# Altium PCB NetTroll.PcbDoc (part 1 of 2)
Units mm, origin at the board's own origin, x right, y up, seen from the top; angles counter-clockwise.
Board outline 65 x 60 mm, 2 copper layers (Top Layer, Bottom Layer); 90 components, 102 nets, 423 pads, 380 vias.
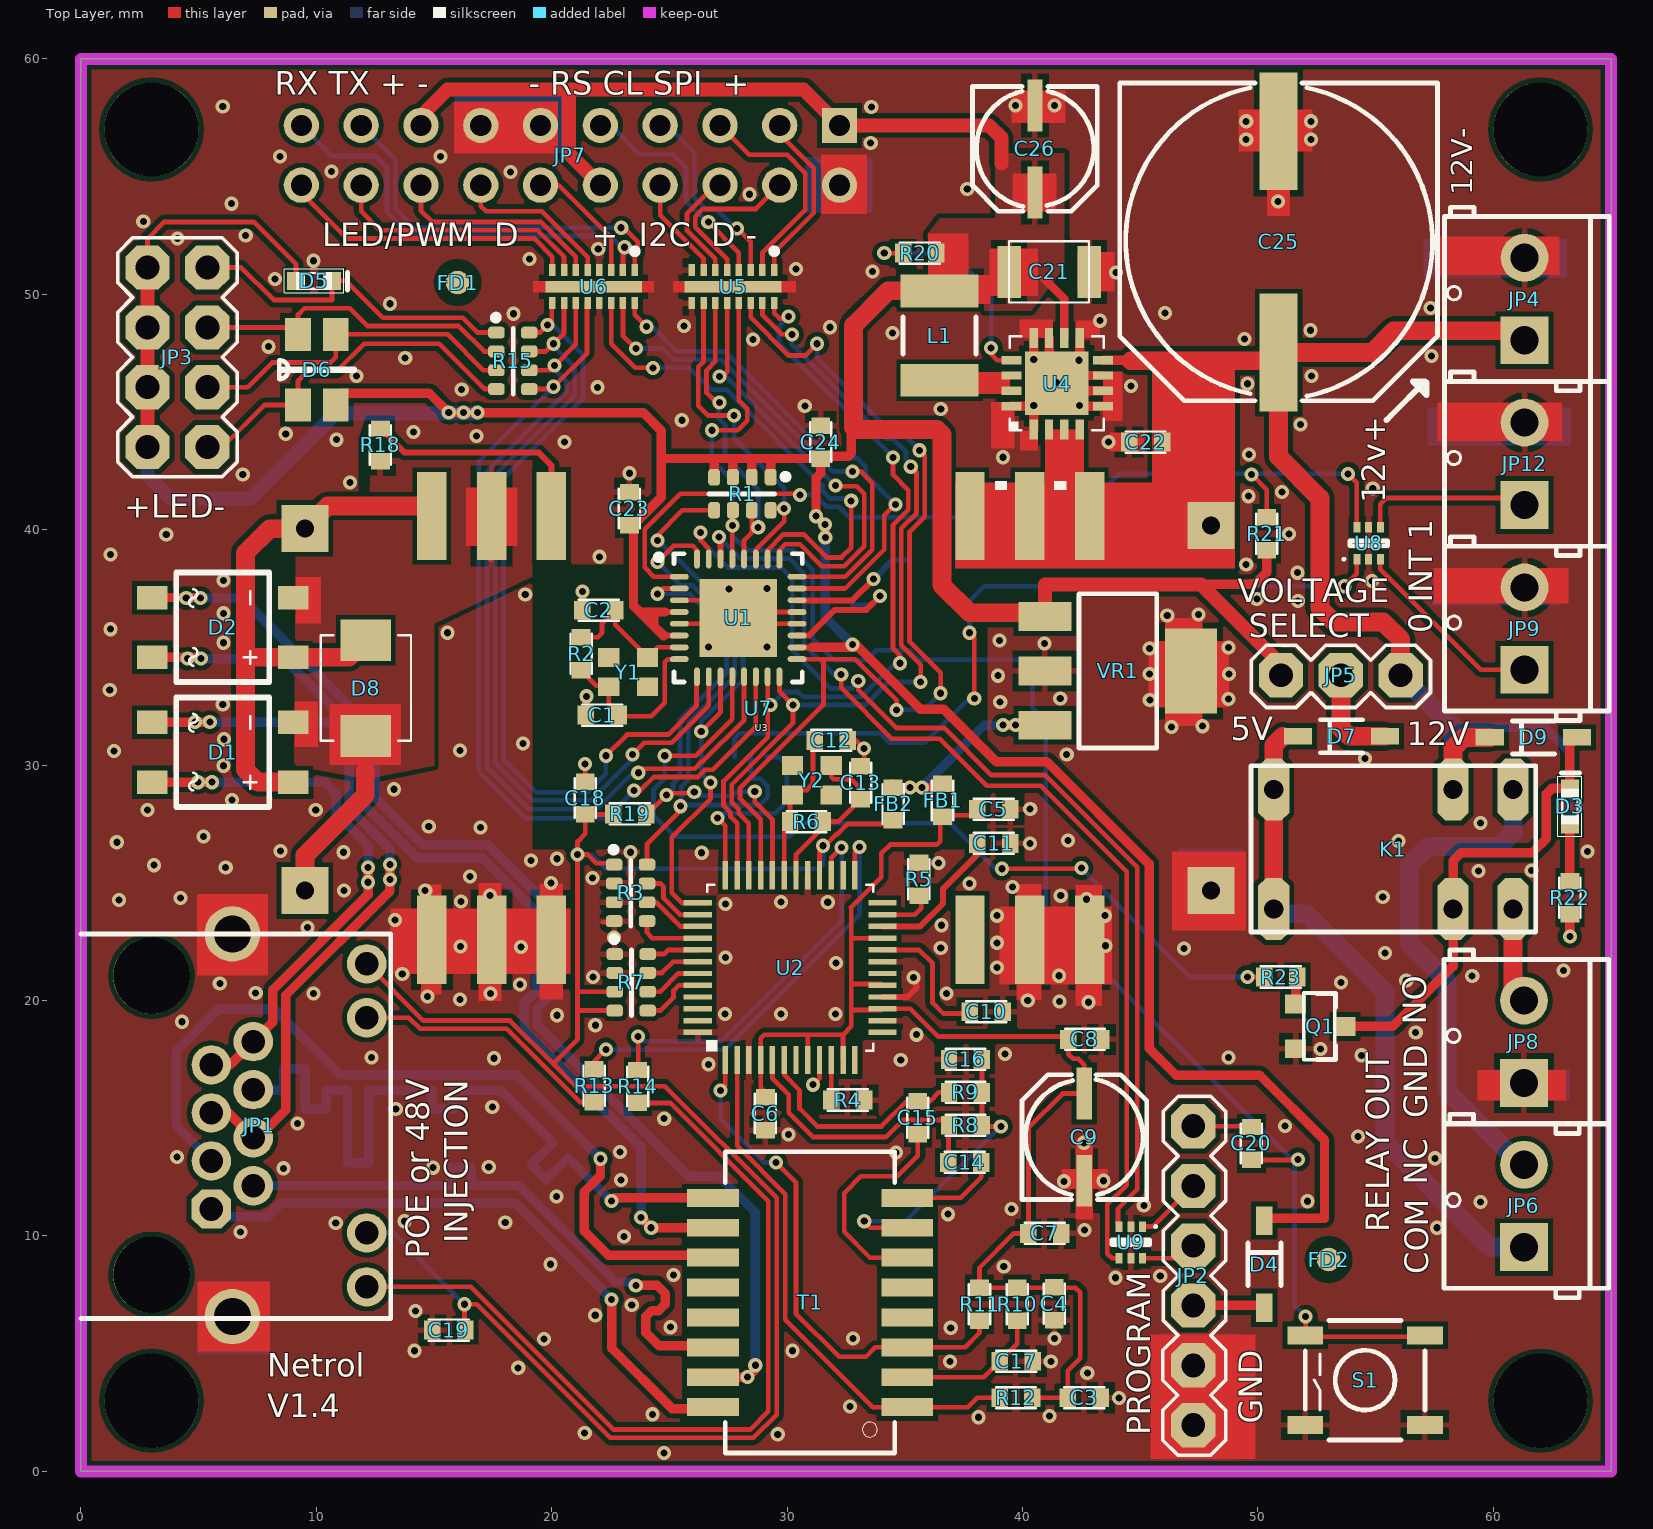
[diagram p0: Top Layer view]
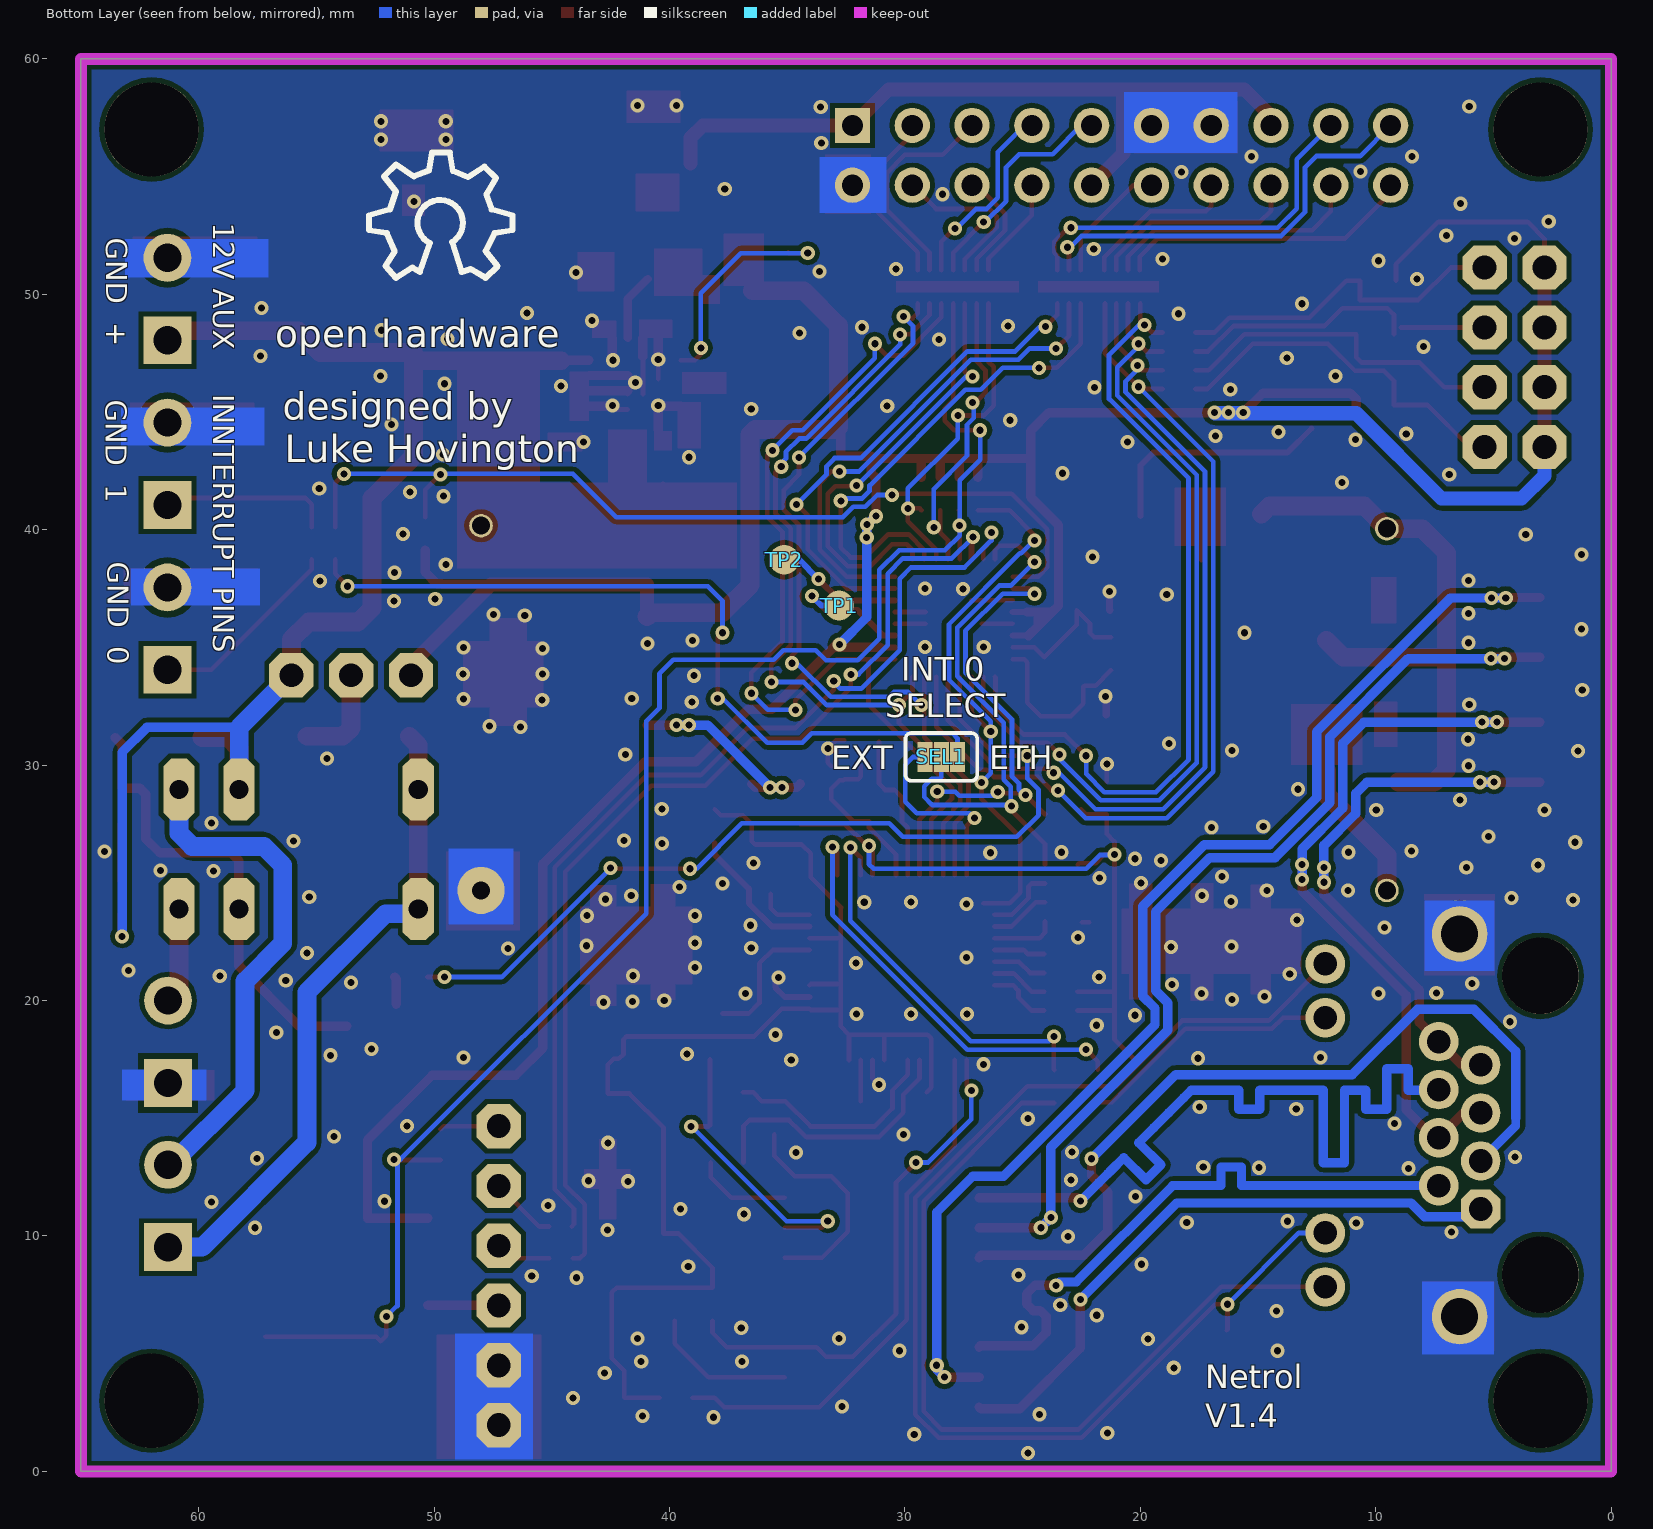
[diagram p1: Bottom Layer view, seen from below]

## Layer stack, top to bottom
Top Solder: solder mask 0.0102, Solder Resist, Dk 3.5
Top Layer: signal copper 0.0356
Dielectric1: dielectric 0.32, FR-4, Dk 4.8
Bottom Layer: signal copper 0.0356
Bottom Solder: solder mask 0.0102, Solder Resist, Dk 3.5

## Board outline
0,0 0,60 65,60 65,0

## Design rules (kind name [scope] priority, off if disabled: settings)
Clearance FDM [HasFootprint('FD')] p1: gap=0.5
Clearance Clearance_poly_pads [Inpolygon] p2: gap=0.2
Clearance Clearance_1 [InComponent('SEL1')] p3: gap=0.05
Clearance [All] p4: gap=0.15
ComponentClearance [Not InComponent('U3')] p1 off: gap=0.254 collisioncheckmode=3 verticalgap=0.254 showdistances=FALSE
DiffPairsRouting [All] p1: maxlimit=0.254 minlimit=0.254 mostfreqgap=0.254 toplayer_minwidth=0.381 toplayer_maxwidth=0.381 toplayer_prefwidth=0.381 bottomlayer_minwidth=0.381 bottomlayer_maxwidth=0.381 bottomlayer_prefwidth=0.381 maxuncoupledlength=12.7
HoleSize [All] p1: absolutevalues=TRUE maxlimit=4 minlimit=0.025 maxpercent=80.000 minpercent=20.000
HoleToHoleClearance [All] p1: gap=0.2 allowstackedmicrovias=TRUE
MatchedLengths Eth_Chip_TX [All] p1: tolerance=0.5 checknetsindiffpair=TRUE checkdiffpairvsdiffpair=TRUE checkothers=FALSE
MinimumSolderMaskSliver [All] p1 off: minsoldermaskwidth=0.254
PolygonConnect PolygonConnect_1 [All vs isvia] p1: connectstyle=Direct reliefconductorwidth=0.254 reliefentries=4 polygonreliefangle="90 Angle" airgapwidth=0.254
PolygonConnect [All] p2: connectstyle=Relief reliefconductorwidth=0.254 reliefentries=4 polygonreliefangle="90 Angle" airgapwidth=0.254
RoutingVias [All] p1: holewidth=0.3 width=0.6 viastyle="Through Hole" minholewidth=0.25 minwidth=0.6 maxholewidth=0.711 maxwidth=1.27
SilkToSilkClearance [All] p1 off: silktosilkclearance=0.254
SilkToSolderMaskClearance [IsPad] p1 off: minsilkscreentomaskgap=0.15 clearancetoexposedcopper=TRUE
SolderMaskExpansion [All] p1: expansion=0.102
UnpouredPolygon [All] p1: allowunpoured=FALSE
Width [All] p1: maxlimit=0.8 minlimit=0.2 preferedwidth=0.254 minimp=50.000000 maximp=50.000000 favimp=50.000000
22 further rules are at their usual default settings.

## Classes and differential pairs
component class Ethernet: C3 C4 C5 C6 C7 C8 C9 C10 C11 C12 C13 C14 C15 C16 C17 C18 C19 D1 D2 D8 FB1 FB2 JP1 R3 R4 R5 R6 R7 R8 R9 R10 R11 R12 R13 R14 R19 SEL1 T1 U2 Y2
component class Designator: C1 C2 C21 C22 C23 C24 C25 C26 L1 R1 R2 R18 R20 S1 U1 U3 U4 U7 VR1 Y1
component class U_Output: C20 D3 D4 D5 D6 D7 D9 FD1 FD2 JP2 JP3 JP4 JP5 JP6 JP7 JP8 JP9 JP12 K1 Q1 R15 R21 R22 R23 TP1 TP2 U5 U6 U8 U9
differential pair XD1: +XD1_P -XD1_N
differential pair EP_RX: +EP_RX_P -EP_RX_N
differential pair EP_TX: +EP_TX_P -EP_TX_N
differential pair EC_RX: +EC_RX_P -EC_RX_N
differential pair RX: +RX_P -RX_N
differential pair TX: +TX_P -TX_N

## Components (designator, comment, footprint, x,y, rotation, side; value= is the part's Value field where it differs from the comment)
C1 "10pF" 0603 21.446,32.129 r0 top
C2 "10pF" 0603 21.296,36.579 r0 top
C3 "100nF" 0603 43.321,3.129 r180 top
C4 "100nF" 0603 41.348,6.425 r90 top
C5 "100nF" 0603 39.475,28.125 r180 top
C6 "100nF" 0603 29.075,14.5 r90 top
C7 "100nF" 0603 41.648,10.106 r180 top
C8 "100nF" 0603 43.35,18.35 r180 top
C9 "100uF" PANASONIC_C 42.425,14.15 r90 top
C10 "4.7uF" 0603 39.15,19.525 r180 top
C11 "10nF" 0603 39.475,26.675 r180 top
C12 "10pF" 0603 32.571,31.054 r180 top
C13 "10pF" 0603 33.121,29.954 r270 top
C14 "6.8nF" 0603 38.25,13.125 r180 top
C15 "6.8nF" 0603 35.55,14.325 r90 top
C16 "10nF" 0603 36.875,17.5 r0 top
C17 "100nF" 0603 40.425,4.675 r180 top
C18 "100nF" 0603 21.421,29.304 r270 top
C19 "100nF" 0603 14.925,6 r0 top
C20 "100nF" 0603 49.721,14.629 r270 top
C21 "22uF" 1210 42.825,50.95 r180 top
C22 "10uF" 0603 45.925,43.725 r180 top
C23 "10uF" 0603 23.3,41.6 r270 top
C24 "10uF" 0603 31.425,44.425 r270 top
C25 "1000uF" PANASONIC_H13 50.875,52.225 r270 top
C26 "100uF" PANASONIC_C 40.725,56.225 r270 top
D1 "HD01-T" MBS 6.025,30.55 r90 top
D2 "HD01-T" MBS 6.025,35.85 r90 top
D3 "LED" LED-0603 63.25,28.25 r90 top
D4 "Diode" SOD-123 50.275,8.8 r90 top
D5 "LED" LED-0603 9.9,50.575 r0 top
D6 "LED-RGB_K" RGB-CLVBAFKA 9.225,45.3 r90 top
D7 "Diode" SOD-123 53.55,31.225 r180 top
D8 "SMAJ58CA-TR" SMBJ 12.1,33.275 r270 top
D9 "Diode" SOD-123 61.7,31.175 r180 top
FB1 "Ferrite Bead" 0603 36.6,29.2 r270 top
FB2 "Ferrite Bead" 0603 34.5,29.05 r270 top
FD1 "Fiducial" FD#1 21.975,43.375 r0 top
FD2 "Fiducial" FD#2 55.3,8.425 r90 top
JP1 "RJHSE-5384" RJHSE-5484 3,14.7 r270 top
JP2 "Programming FTDI Header" 1X6 48.521,10.854 r270 top
JP3 "Optional External LED's" 2X4 4.1,47.325 r270 top
JP4 "12V In/Out" SCREWTERMINAL-3.5MM-2 61.325,48.05 r90 top
JP5 "Relay Voltage Jumper" 1X3 52.25,32.55 r180 top
JP6 "Common/NC" SCREWTERMINAL-3.5MM-2 61.3,9.525 r90 top
JP7 "Optional I/O" 2X10 32.225,57.175 r180 top
JP8 "GND/NO" SCREWTERMINAL-3.5MM-2 61.3,16.5 r90 top
JP9 "Selectable interrupt Via solder bridge" SCREWTERMINAL-3.5MM-2 61.325,34.05 r90 top
JP12 "Main Interrupt" SCREWTERMINAL-3.5MM-2 61.325,41.05 r90 top
K1 "G5V-1-DC12" G5V-1 55.75,26.425 r180 top
L1 "6.8uH" 1812 36.475,48.25 r90 top
Q1 "BCX19" SOT23-3 52.6,18.9 r90 top
R1 "10K" SO8_S 29.296,42.229 r270 top
R2 "1M" 0603 21.246,34.029 r90 top
R3 "10K" SO8_S 22.65,25.775 r0 top
R4 "12K4" 0603 33.275,15.775 r180 top
R5 "10K" 0603 35.6,25.85 r270 top
R6 "1M" 0603 30.121,27.604 r0 top
R7 "10K" SO8_S 22.675,21.975 r0 top
R8 "82R" 0603 36.875,14.7 r0 top
R9 "82R" 0603 38.275,16.1 r180 top
R10 "10R" 0603 39.771,6.404 r90 top
R11 "49R9" 0603 38.171,6.404 r90 top
R12 "49R9" 0603 39.021,3.129 r0 top
R13 "220R" 0603 21.8,15.675 r90 top
R14 "220R" 0603 23.65,15.65 r90 top
R15 "100R" SO8_S 17.65,48.375 r0 top
R18 "ClassR" 0603 12.725,42.9 r90 top
R19 "10K" 0603 24.021,27.929 r180 top
R20 "1M" 0603 34.925,51.75 r0 top
R21 "10K" 0603 50.375,39.125 r90 top
R22 "470R" 0603 63.25,25.075 r270 top
R23 "4K7" 0603 51.675,21 r180 top
S1 "SW-PB" TACTILE_SWITCH_SMD 54.55,3.875 r180 top
SEL1 "SELECTOR" SJ_3_PASTE2&3 28.45,30.35 r0 bottom
T1 "H2019FNLT" HXXXX 30.975,7.175 r90 top
TP1 "Test Point" PAD.03X.05 32.796,36.779 r90 bottom
TP2 "Test Point" PAD.03X.05 35.125,38.725 r90 bottom
U1 "ATmega328P-MUR" 32M1-A_N 27.921,36.254 r0 top
U2 "Wiznet-W5500" QFN48 30.125,21.4 r90 top
U3 "AG8112" AG8100 42.846,40.579 r180 top
U4 "TPS62112RSAT" 16-QFN 41.45,46.225 r90 top
U5 "NUF8402MNT4G" ONSC-DFN-16-506AC_V 27.7,50.325 r270 top
U6 "NUF8402MNT4G" ONSC-DFN-16-506AC_V 21.775,50.325 r270 top
U7 "Buck Converter" BUCK_MODULE 28.7,32.425 r0 top
U8 "NUF2230XV6T1G" ONSC-SOT-563-6-463A-01_V 54.7,39.425 r90 top
U9 "NUF2230XV6T1G" ONSC-SOT-563-6-463A-01_V 44.6,9.725 r270 top
VR1 "VReg 3V3" SOT223 44.05,34 r270 top
Y1 "16MHz" CRYSTAL-SMD-2.5X2-ABM10 23.271,33.979 r0 top
Y2 "25Mhz" CRYSTAL-SMD-2.5X2-ABM10 31.071,29.379 r0 top

## Footprints (in the part's own frame and the unit in brackets; to place one, negate y for a bottom-side part, rotate by r counter-clockwise, add the part's x,y. Pads: shape width x height; smd on the part's side, far side on the other; paste and mask are expansions set on the pad)
1X3 [mil]
  oct 74x74 hole 40: 1(-150,-50) 2(-50,-50) 3(50,-50)
  silkscreen extent -200,-100 100,4
1X6 [mil]
  oct 74x74 hole 40: 1(-150,-50) 2(-50,-50) 3(50,-50) 4(150,-50) 5(250,-50) 6(350,-50)
  silkscreen extent -200,-101 400,4
2X4 [mil]
  oct 74x74 hole 40: 1(-150,-50) 2(-150,50) 3(-50,-50) 4(-50,50) 5(50,-50) 6(50,50) 7(150,-50) 8(150,50)
  silkscreen extent -200,-100 200,100
2X10 [mm] "Connector; Header; 10x2 Position"
  rect 1.5x1.5 hole 0.9: 1(0,0)
  round 1.5 hole 0.9: 2(0,2.54) 3(2.54,0) 4(2.54,2.54) 5(5.08,0) 6(5.08,2.54) 7(7.62,0) 8(7.62,2.54) 9(10.16,0) 10(10.16,2.54) 11(12.7,0) 12(12.7,2.54) 13(15.24,0) 14(15.24,2.54) 15(17.78,0) 16(17.78,2.54) 17(20.32,0) 18(20.32,2.54) 19(22.86,0) 20(22.86,2.54)
16-QFN [mm]
  rect 2.7x2.7 smd paste-0.55: 0(0,0)
  rect 0.85x0.35 smd paste-0.05: 1(-1.975,0.975) 2(-1.975,0.325) 3(-1.975,-0.325) 4(-1.975,-0.975) 9(1.925,-0.975) 10(1.925,-0.325) 11(1.925,0.325) 12(1.925,0.975)
  rect 0.35x0.85 smd paste-0.05: 5(-0.975,-1.975) 6(-0.325,-1.975) 7(0.325,-1.975) 8(0.975,-1.975) 13(0.975,1.925) 14(0.325,1.925) 15(-0.325,1.925) 16(-0.975,1.925)
  silkscreen extent -2,-2 2,2
32M1-A_N [mm] "QFN, 32-Leads, Body 5x5mm, Pitch 0.5mm, IPC Medium Density"
  oval 0.8x0.25 smd paste-0.04: 1(-2.5,1.75) 2(-2.5,1.25) 3(-2.5,0.75) 4(-2.5,0.25) 5(-2.5,-0.25) 6(-2.5,-0.75) 7(-2.5,-1.25) 8(-2.5,-1.75) 17(2.5,-1.75) 18(2.5,-1.25) 19(2.5,-0.75) 20(2.5,-0.25) 21(2.5,0.25) 22(2.5,0.75) 23(2.5,1.25) 24(2.5,1.75)
  oval 0.25x0.8 smd paste-0.04: 9(-1.75,-2.5) 10(-1.25,-2.5) 11(-0.75,-2.5) 12(-0.25,-2.5) 13(0.25,-2.5) 14(0.75,-2.5) 15(1.25,-2.5) 16(1.75,-2.5) 25(1.75,2.5) 26(1.25,2.5) 27(0.75,2.5) 28(0.25,2.5) 29(-0.25,2.5) 30(-0.75,2.5) 31(-1.25,2.5) 32(-1.75,2.5)
  rect 3.3x3.3 smd paste-0.6: 33(0,0)
  silkscreen extent -3.5,-2.73 2.73,2.73, body extent -2.58,-2.58 2.58,2.58, height 1
0603 [mm]
  rect 0.7x0.8 smd paste+0 mask+0.1: 1(0,0) 2(1.4,0)
  silkscreen extent -0.15,-0.45 1.55,0.45, body extent -0.15,-0.45 1.55,0.45, height 0.53
1210 [mm] "Chip Resistor; Body 3.2 x 1.6 mm (LxW typ)"
  rect 1x2.2 smd paste+0 mask+0.1: 1(0,0) 2(3.4,0)
  silkscreen extent 0,-1.3 3.4,1.3
1812 [mm] "Chip Capacitor, Body 4.5x3.2mm, IPC High Density"
  rect 1.4x3.3 smd: 1(-1.9,0) 2(1.9,0)
  silkscreen extent -0.8,-1.55 0.8,1.55, body extent -2.4,-1.7 2.4,1.7, height 2.6
AG8100 [mm]
  rect 1.25x3.75 smd: 1(0,0) 2(2.54,0) 3(5.08,0) 4(22.86,0) 5(25.4,0) 6(27.94,0) 7(27.94,18) 8(25.4,18) 9(22.86,18) 10(5.08,18) 11(2.54,18) 12(0,18)
  silkscreen extent 0.97,-1.5 4.02,-1.1, body extent -1.25,-1.12 29.13,19.38, height 10
BUCK_MODULE [mil]
  rect 78.74x78.74 / inner rect 78.74x78.74 / far side round 39.37 hole 30: 1(-755,300) 4(-755,-305)
  rect 78.74x78.74 / inner round 39.37 / far side round 39.37 hole 30: 2(760,305)
  rect 78.74x78.74 / inner rect 78.74x78.74 / far side round 78.74 hole 30: 3(760,-305)
  body extent -855,-400 855,400, height 591
CRYSTAL-SMD-2.5X2-ABM10 [mm]
  rect 0.9x0.8 smd: 1(-0.85,-0.65) 2(0.8,-0.65) 3(0.8,0.6) 4(-0.85,0.6)
  body extent -1.3,-1.05 1.3,1.05, height 0.5
FD#1 [mm]
  round 1 smd paste-2 mask+0.5: 0(-5.975,7.125)
FD#2 [mm]
  round 1 smd paste-2 mask+0.5: 0(0.575,2.3)
G5V-1 [mil]
  oct 52x104 hole 32: 1(-200,-100) 2(-100,-100) 5(200,-100) 6(200,100) 9(-100,100) 10(-200,100)
  silkscreen extent -238,-140 238,138, body extent -241,-143 241,143, height 394
HXXXX [mm]
  rect 0.76x2.2 smd: 1(-4.445,-4.128) 2(-3.175,-4.128) 3(-1.905,-4.128) 4(-0.635,-4.128) 5(0.635,-4.128) 6(1.905,-4.128) 7(3.175,-4.128) 8(4.445,-4.128) 9(4.445,4.127) 10(3.175,4.127) 11(1.905,4.127) 12(0.635,4.127) 13(-0.635,4.127) 14(-1.905,4.127) 15(-3.175,4.127) 16(-4.445,4.127)
  silkscreen extent -6.4,-3.6 6.4,3.6, body extent -6.38,-4.28 6.38,4.13, height 6
LED-0603 [mil]
  rect 30x30 smd: 1(-30,0) 2(30,0)
  Top Overlay keep-out lines w2: -50,20 -50,-20 50,-20 50,20 -50,20
  silkscreen extent -50,-20 56,20
MBS [mm]
  rect 1x1.3 smd: +(-1.27,-3) -(1.27,-3) AC1(-1.27,3) AC2(1.27,3)
  silkscreen extent -2.32,-1.98 2.33,1.98, body extent -2.37,-2 2.37,2, height 2.7
ONSC-DFN-16-506AC_V [mm] "SON, 16-Leads, Body 4x1.6mm, Pitch 0.5mm, Thermal Pad 4.1x0.5mm"
  rect 0.51x0.28 smd: 1(-0.7,1.75) 2(-0.7,1.25) 3(-0.7,0.75) 4(-0.7,0.25) 5(-0.7,-0.25) 6(-0.7,-0.75) 7(-0.7,-1.25) 8(-0.7,-1.75) 9(0.7,-1.75) 10(0.7,-1.25) 11(0.7,-0.75) 12(0.7,-0.25) 13(0.7,0.25) 14(0.7,0.75) 15(0.7,1.25) 16(0.7,1.75)
  rect 0.5x4.1 smd: 17(0,0)
  silkscreen extent -1.63,1.63 -1.38,1.88, body extent -0.8,-2 0.8,2, height 1
ONSC-SOT-563-6-463A-01_V [mm] "SOT23, 6-Leads, Body 1.6x1.2mm, Pitch 0.5mm"
  rect 0.45x0.3 smd: 1(-0.675,0.5) 2(-0.675,0) 3(-0.675,-0.5) 4(0.675,-0.5) 5(0.675,0) 6(0.675,0.5)
  silkscreen extent -0.72,-0.8 0.1,1.1, body extent -0.6,-0.8 0.6,0.8, height 0.6
PAD.03X.05 [mm]
  round 1.27 smd: 1(0,0)
PANASONIC_C [mm]
  rect 2.2x0.65 smd: +(1.9,-0.2) -(-1.8,-0.2)
  silkscreen extent -2.6,-2.85 2.7,2.45, body extent -2.63,-2.88 2.75,2.5, height 5.4
PANASONIC_H13 [mm]
  rect 5x1.6 smd: +(4.7,0) -(-4.7,0)
  silkscreen extent -6.75,-6.75 6.75,6.75, body extent -6.75,-6.75 6.75,6.75, height 13.5
QFN48 [mm]
  rect 1.2x0.23 smd: 1(-3.925,2.75) 2(-3.925,2.25) 3(-3.925,1.75) 4(-3.925,1.25) 5(-3.925,0.75) 6(-3.925,0.25) 7(-3.925,-0.25) 8(-3.925,-0.75) 9(-3.925,-1.25) 10(-3.925,-1.75) 11(-3.925,-2.25) 12(-3.925,-2.75) 25(3.925,-2.75) 26(3.925,-2.25) 27(3.925,-1.75) 28(3.925,-1.25) 29(3.925,-0.75) 30(3.925,-0.25) 31(3.925,0.25) 32(3.925,0.75) 33(3.925,1.25) 34(3.925,1.75) 35(3.925,2.25) 36(3.925,2.75)
  rect 0.23x1.2 smd: 13(-2.75,-3.925) 14(-2.25,-3.925) 15(-1.75,-3.925) 16(-1.25,-3.925) 17(-0.75,-3.925) 18(-0.25,-3.925) 19(0.25,-3.925) 20(0.75,-3.925) 21(1.25,-3.925) 22(1.75,-3.925) 23(2.25,-3.925) 24(2.75,-3.925) 37(2.75,3.925) 38(2.25,3.925) 39(1.75,3.925) 40(1.25,3.925) 41(0.75,3.925) 42(0.25,3.925) 43(-0.25,3.925) 44(-0.75,3.925) 45(-1.25,3.925) 46(-1.75,3.925) 47(-2.25,3.925) 48(-2.75,3.925)
  silkscreen extent -3.57,-3.53 3.52,3.57
RGB-CLVBAFKA [mm]
  rect 1.4x1.1 smd: 1(0,0) 2(0,-1.6) 3(3,-1.6) 4(3,0)
  silkscreen extent 1.1,-2.4 1.9,0.8
RJHSE-5484 [mm]
  oct 1.676x1.676 hole 1: 1(3.555,2.54)
  round 1.676 hole 1: 2(2.565,4.32) 3(1.515,2.54) 4(0.525,4.32) 5(-0.525,2.54) 6(-1.515,4.32) 7(-2.565,2.54) 8(-3.555,4.32) 9(-6.86,9.14) 10(-4.57,9.14) 11(4.57,9.14) 12(6.86,9.14)
  round 2.355 hole 1.57: GND1(-8.13,3.43) GND2(8.13,3.43)
  round 3.25 hole 3.25 unplated: ""(-6.35,0) ""(6.35,0)
  silkscreen extent -8.13,-3 8.2,10.16, body extent -8.13,-5.08 8.2,10.15, height 13.46
SCREWTERMINAL-3.5MM-2 [mil]
  rect 80x80 hole 47.24: 1(0,0)
  round 80 hole 47.24: 2(137.79,0)
  silkscreen extent -85,-142 222,134, body extent -69,-143 207,133, height 327
SJ_3_PASTE2&3 [mm]
  rect 0.635x1.27 smd paste-0.838: 1(-0.685,0)
  rect 0.635x1.27 smd: 2(0,0) 3(0.685,0)
  silkscreen extent -1.52,-1.02 1.52,1.02
SMBJ [mm]
  rect 1.78x2.16 smd: 1(2.04,0) 2(-2.03,0)
  silkscreen extent -2.24,-1.92 2.24,1.92, body extent -2.25,-1.92 2.25,1.92, height 2.45
SO8_S [mm] "SOIC, 8-Leads, Body 4.9x3.9mm, Pitch 1.27mm, IPC Low Density"
  rrect50% 0.7x0.5 smd: 1(0,0) 2(0,-0.8) 3(0,-1.6) 4(0,-2.4) 5(1.4,-2.4) 6(1.4,-1.6) 7(1.4,-0.8) 8(1.4,0)
  silkscreen extent -0.15,-2.62 0.71,0.76, body extent -0.05,-2.88 1.43,0.58, height 0.53
SOD-123 [mm]
  rect 1.2x0.7 smd: A(-1.85,0) K(1.85,0)
  silkscreen extent -0.9,-0.7 0.9,0.7, body extent -1.25,-0.75 1.25,0.75, height 1.36
SOT23-3 [mm]
  rect 0.8x0.9 smd: 1(-0.95,1) 2(0.95,1) 3(0,-1.1)
  silkscreen extent -1.42,-0.7 1.42,0.66
SOT223 [mil]
  rect 48x88 smd: 1(-91,-122) 2(0,-122) 3(91,-122)
  rect 141.73x86.61 smd: 2(0,122.01)
  silkscreen extent -129,-65 129,65
TACTILE_SWITCH_SMD [mil]
  rect 60x30 smd: 1(-100,75) 2(100,75) 3(-100,-75) 4(100,-75)
  silkscreen extent -100,-100 100,100, body extent -103,-108 103,103, height 122

## Part data
C1 C2 C12 C13: library part Cap_10pF, "Capacitor (Semiconductor SIM Model)"
C3 C4 C5 C6 C7 C8 C18 C19: library part Cap_100pF, "Capacitor (Semiconductor SIM Model)"
C9 C26: library part Cap_Polarized_100uF, "Polarized Capacitor (Surface Mount)"
C10: library part Cap_4.7uF, "Capacitor (Semiconductor SIM Model)"
C11 C16: library part Cap_10nF, "Capacitor (Semiconductor SIM Model)"
C14 C15: library part Cap_6.8nF, "Capacitor (Semiconductor SIM Model)"
C17 C20: library part Cap_100nF, "Capacitor (Semiconductor SIM Model)"
C21: library part Cap_22uF, "Capacitor (Semiconductor SIM Model)"
C22 C23 C24: library part Cap_10uF, "Capacitor (Semiconductor SIM Model)"
C25: library part Cap_Polarized_1000uF, "Polarized Capacitor (Surface Mount)"
D1 D2: library part "Diode Bridge", "Diode Bridge"
D3 D5: "Typical RED, GREEN, YELLOW, AMBER GaAs LED"
D4 D7 D9: "Default Diode"
D6: "RED, GREEN, BLUE LED"
D8: library part Diode_POWER, "Default Diode"
JP1: library part "Ethernet Socket", "Ethernet Socket RJ45 With Leds"
JP2: library part "Header 6", "Header, 6-Pin"
JP3: library part "Header 4x2", "Header, 8-Pin"
JP4 JP6 JP8 JP9 JP12: library part "Header 2_ST", "Header, 2-Pin"
JP5: library part "Header 3", "Header, 3-Pin"
JP7: library part "Header 10X2", "Header, 10-Pin, Dual row"
K1: library part Relay-SPDT, "Single-Pole Dual-Throw Relay"
L1: library part INDUCTOR, "INDUCTOR WW 6.8UH 1.1A 1812 SMD"
Q1: "NPN General Purpose"
R1 R3 R7: library part Resistor_Pack_10K, "Isolated Resistor Network - Parts"
R2 R6 R20: library part Resistor_1M, "Resistor"
R4: library part Resistor_12K4, "Resistor"
R5 R19 R21: library part Resistor_10K, "Resistor"
R8 R9: library part Resistor_82R, "Resistor"
R10: library part Resistor_10R, "Resistor"
R11 R12: library part Resistor_49R9, "Resistor"
R13 R14: library part Resistor_220R, "Resistor"
R15: library part Resistor_Pack_100R, "Isolated Resistor Network - Parts"
R18: library part Resistor, "Resistor"
R22: library part Resistor_470R, "Resistor"
R23: library part Resistor_4K7, "Resistor"
S1: "Switch"
SEL1: "Solder Selector"
T1: library part Magnetics, "Power over Ethernet Magnetic Module"
TP1 TP2: library part TestPoint, "Header, 2-Pin"
U1: "8-bit AVR Microcontroller, 32KB Flash, 1KB EEPROM, 2KB SRAM, 32-pin MLF, Industrial Grade (-40°C to 85°C)"
U2: "W5500 Fast SPI Ethernet Controller"
U3: library part AG8100, "POE Controller and Buck Converter"
U4: "IC REG BUCK SYNC 5V 1.5A 16QFN"
U5 U6: library part CMP-1009-00001-1, "8-Channel EMI Filter with Integrated ESD Protection, -40 to 85 degC, 16-Pin DFN, Pb-Free, Tape and Reel"
U7: library part Buck, "Adjustable Buck Converter Module"
U8 U9: library part CMP-1066-00031-1, "2 Line EMI Filter with ESD Protection, -40 to 85 degC, 6-Pin SOT-563, Pb-Free, Tape and Reel"
VR1: library part "Volt Reg", "Voltage Regulator"
Y1: library part Crystal_16MHz, "Surface Mount Quartz Crystal"
Y2: library part Crystal_25MHz, "Surface Mount Quartz Crystal"

## Free pads (board coordinates)
  round 4 hole 4 unplated: 0(3,3) 0(3,57) 0(62,3) 0(62,57)

## Via types
v1: diameter 0.6, hole 0.3, Top Layer to Bottom Layer, tented both sides, 380 vias

## Nets (pads, with @x,y where several pads share a name; then routed paths per layer and width w, separated by ;. In a path a pad name is that pad's centre, name@x,y a point inside that pad or via, vN(x,y) a via of type N, cw(c..) or ccw(c..) an arc to the next point about the centre after c; other vN are vias at no path point)
3V3: FB1.1 FB2.1 VR1.3 | length 9.5
  Top Layer w0.4: FB2.1@34.446,29.204 34.6,29.05 v1(35.225,29.05) v1(35.725,29.05) 36.35,29.05 FB1.1@36.5,29.2 ; v1(39.175,31.7) v1(39.7,31.7) 40.94,31.7 VR1.3@40.951,31.689
  Bottom Layer w0.4: v1(35.225,29.05) v1(35.725,29.05) 38.375,31.7 v1(39.175,31.7) v1(39.7,31.7)
3V3A: C3.2 C4.2 C5.2 C6.2 C7.2 C8.2 C9.+ FB1.2 R10.2 R11.2 R12.2 U2.4 U2.8 U2.11 U2.15 U2.17 U2.21 | length 58.4
  Top Layer w0.2: C6.2@29.075,16.1 28.875,16.3 U2.4@28.875,17.475 28.875,18.4 29.025,18.55 30.875,18.55 ; U2.8@30.875,17.475 30.875,18.55 ; U2.11@32.375,17.475 32.375,18.55 ; 32.709,23.95 34,25.241 34,26.25 34.375,26.625 36.35,26.625 36.5,26.775 36.5,27.5 36.875,27.875 37.825,27.875 C5.2@38.075,28.125 ; 32.725,23.934 32.725,22.65 ; U2.17@34.05,20.65 34,20.7 32.725,20.7 ; U2.21@34.05,22.65 32.725,22.65 ; R12.2@40.421,3.129 C3.2@41.921,3.129 41.921,4.271 42.45,4.8 42.45,7.6 42.246,7.804 C4.2@41.369,7.804 ; C4.2@41.327,7.804 R10.2@39.771,7.804 R11.2@38.171,7.804 38.171,8.646 39.631,10.106 C7.2@40.248,10.106 40.248,14.598 41.7,16.05 C9.+@42.625,16.05 42.625,17.275 42.375,17.525 42.15,17.525 41.95,17.725 C8.2@41.95,18.35 41.825,18.475 36.4,18.475 35.225,19.65 U2.15@34.05,19.65 34,19.6 32.725,19.6 ; 30.875,18.55 32.375,18.55 ; 32.375,18.55 32.725,18.9 32.725,19.6 ; 32.725,19.6 32.725,20.7 ; 32.725,20.7 32.725,22.65
3V3D: C18.2 C19.2 FB2.2 JP1.9 JP1.11 R3.1 R7.3 R7.4 R19.2 U2.28 | length 86.5
  Top Layer w0.2: JP1.9@12.14,21.56 14.55,19.15 18.225,19.15 20.061,17.314 ; C19.2@16.325,6 16.293,6.032 v1(16.293,7.1) 16.805,7.1 22.48,1.425 28.57,1.425 29.553,2.408 29.553,11.617 24.804,16.366 21.009,16.366 20.061,17.314 ; R19.2@22.521,28.129 22.296,27.904 C18.2@21.421,27.904 21.421,27.079 21.096,26.754 v1(21.096,26.204) ; R3.1@22.65,25.775 22.596,25.829 21.895,25.829 21.52,26.204 v1(21.096,26.204) ; R7.4@22.675,19.575 21.096,19.575 ; R7.3@22.675,20.375 21.121,20.375 21.096,20.35 ; U2.28@31.375,25.325 31.375,26.313 ; v1@31.652,26.63 32.074,27.052 32.114,27.052 32.566,27.504 FB2.2@34.446,27.504 ; 20.061,17.314 21.096,18.35 21.096,19.575 ; 21.096,19.575 21.096,20.35 ; 21.096,20.35 21.096,21.729 v1(21.096,26.204)
  Bottom Layer w0.2: JP1.11@12.14,10.13 13.262,10.13 v1(16.293,7.1) ; v1(21.096,26.204) 20.971,26.204 20.946,26.179 21.721,26.179 22.296,25.604 31.329,25.604 31.525,25.8 v1(31.525,26.575)
5V: C21.2 C23.2 C24.2 C26.+ D4.K D5.1 D6.2 JP3.1 JP3.3 JP3.5 JP3.7 JP5.3 JP7.1 JP7.10 JP7.15 L1.2 R1.1 R1.2 R1.3 R1.4 R20.2 R21.1 U1.4 U1.6 U1.18 U4.10 VR1.1 | length 202
  Top Layer w0.2: JP3.1@2.83,51.135 2.83,52.355 3.55,53.075 7.342,53.075 9.138,51.279 D5.1@9.138,50.575
  Top Layer w0.25: 24.746,35.504 U1.6@25.421,35.504 ; 24.8,36.504 U1.4@25.421,36.504 ; U1.18@30.421,35.004 31.075,35.004
  Top Layer w0.35: 40.925,50.65 41.775,49.8 U4.10@41.775,48.15
  Top Layer w0.4: D6.2@10.825,45.3 10.825,45.55 11.075,45.8 14.8,45.8 v1(15.625,44.975) v1(16.25,44.975) v1(16.85,44.975) 23.886,44.975 24.661,44.2 24.661,41.386 23.475,40.2 23.475,36.775 23.746,36.504 ; 24.686,43.025 C24.2@31.425,43.025 ; 24.746,35.504 24.327,35.923 ; 24.8,36.504 24.327,36.504 ; R1.4@26.896,42.229 26.896,43.021 ; R1.3@27.696,42.229 27.696,43.004 ; R1.2@28.496,42.229 28.496,42.979 ; R1.1@29.296,42.229 29.296,42.979 ; 31.075,35.004 v1@33.032,35.004 ; v1(31.225,40.575) 31.225,42.2 31.425,42.4 C24.2@31.425,43.025 ; v1@31.3,40.625 31.25,40.575 v1(31.6,40.225) 31.621,40.204 v1(31.621,39.675) ; v1(32.771,35.129) 32.907,35.129 v1@33.032,35.004 ; 33.179,44.254 33.175,44.25 32.719,44.25 32.719,43.244 32.6,43.125 31.425,43.125 C24.2@31.425,43.025 ; 47.574,37.676 49.657,37.676 49.681,37.7 49.875,37.7 50.375,38.2 R21.1@50.375,39.125 ; D4.K@50.275,10.754 52.825,10.754 52.825,14.075 50.075,16.825 46.525,16.825 45.375,17.975 45.375,25.803 41.028,30.15 38.875,30.15 36.646,32.379 35.657,32.379 v1@33.032,35.004 ; 23.746,36.504 24.327,35.923 ; 23.746,36.504 24.327,36.504 ; 24.327,35.923 24.327,36.504
  Top Layer w0.6: JP3.7@2.83,43.515 JP3.5@2.83,46.055 JP3.3@2.83,48.595 JP3.1@2.83,51.135 ; JP7.15@14.445,57.175 14.445,57.57 15.575,58.7 20.725,58.7 ; JP7.10@22.065,54.635 20.725,55.975 20.725,58.7 ; 39.1,55.55 39.1,56.65 38.575,57.175 JP7.1@32.225,57.175 30.7,58.7 20.725,58.7 ; VR1.1@40.951,36.311 40.951,37.676 47.574,37.676 50.98,34.27 JP5.3@50.98,33.82
  Top Layer w0.8: L1.2@36.295,50.33 L1.2@36.475,50.15 34.295,50.15 32.82,48.675 32.82,44.351 32.917,44.254 33.179,44.254 36.371,44.254 36.575,44.05 36.575,37.65 37.75,36.475 40.788,36.475 VR1.1@40.951,36.311
  Bottom Layer w0.4: v1(31.225,40.575) 31.25,40.575 v1(31.6,40.225) 31.621,40.204 v1(31.621,39.675) 31.621,36.279 v1(32.771,35.129)
  Bottom Layer w0.6: JP3.7@2.83,43.515 2.83,42.295 3.8,41.325 7.2,41.325 10.825,44.95 v1@16.825,44.95
12V: C22.1 C25.+ D9.K JP4.1 JP5.1 K1.2 R22.2 U3.1 U3.2 U3.3 U4.2 U4.3 U4.4 U4.8 U7.2 | length 61.4
  Top Layer w0.4: U3.2@40.261,41.851 40.261,40.329 41.121,41.189 ; U4.8@43.425,47.2 44.575,47.2 44.596,47.179 ; v1(63.25,22.725) R22.2@63.25,23.675
  Top Layer w0.8: 44.596,47.179 50.746,47.179 C25.+@50.875,47.308 ; C25.+@50.875,47.525 C25.+@50.875,47.308 ; C25.+@50.983,47.416 C25.+@51.096,47.529 ; C25.+@51.296,47.529 54.846,47.529 55.767,48.45 JP4.1@61.325,48.45 ; JP5.1@56.06,33.82 56.06,35.34 55.325,36.075 53.23,36.075 52.63,36.675 52.63,41.345 50.875,43.1 C25.+@50.875,47.308 ; K1.2@58.29,28.965 58.29,30.715 58.75,31.175 D9.K@59.85,31.175
  Bottom Layer w0.4: 58.275,31.605 62.195,31.605 63.25,30.55 v1(63.25,22.725)
  Bottom Layer w0.8: JP5.1@56.06,33.82 58.275,31.605 58.275,28.98 K1.2@58.29,28.965
48V: D1.+ D2.+ D8.2 U3.6 U7.1 | length 25.7
  Top Layer w0.8: 6.996,34.58 D2.+@9.025,34.58 11.375,34.58 D8.2@12.1,35.305 ; D1.+@9.025,29.28 7.52,29.28 6.991,29.809 6.991,39.016 8.02,40.045 U7.1@9.523,40.045 10.487,41.009 14.516,41.009 U3.6@14.861,40.664
A0/D14: U1.23 U6.16 | length 21.6
  Top Layer w0.2: U6.16@23.525,49.625 23.525,49.125 v1(24.025,48.625) ; U1.23@30.421,37.504 32.469,37.504 34.125,39.16 34.125,40.608 v1(34.596,41.079)
  Bottom Layer w0.2: v1(24.025,48.625) 24.27,48.625 25.32,47.575 27.34,47.575 31.872,43.043 32.984,43.043 33.325,42.703 33.325,42.35 v1(34.596,41.079)
A1/D15: U1.24 U6.15 | length 21.3
  Top Layer w0.2: U6.15@23.025,49.625 23.025,48.25 v1(23.575,47.7) ; U1.24@30.421,38.004 32.474,38.004 33.621,39.151 33.621,41.974 33.12,42.475 v1(32.775,42.475)
  Bottom Layer w0.2: v1(23.575,47.7) 24.7,47.7 25.175,47.225 27.195,47.225 31.945,42.475 v1(32.775,42.475) v1@32.921,42.329
A2/D16: U1.25 U5.12 | length 18.6
  Top Layer w0.2: v1(27.126,46.502) 27.252,46.502 27.452,46.702 U5.12@27.45,49.625 U5.12@27.45,49.625 ; U1.25@29.671,38.754 29.671,39.134 29.916,39.379 30.546,39.379 31.475,38.45 32.425,38.45 33.271,39.296 33.271,41.529 32.95,41.85 32.075,41.85 v1(32.05,41.875)
  Bottom Layer w0.2: v1(27.126,46.502) 27.423,46.502 v1(32.05,41.875) v1@32.075,41.85
A6: TP1.1 U1.19 | length 5.5
  Top Layer w0.254: U1.19@30.421,35.504 30.925,35.504 32.021,36.6 33.367,36.6 v1(33.946,37.179)
  Bottom Layer w0.254: TP1.1@32.796,36.779 33.546,36.779 v1(33.946,37.179)
A7: TP2.1 U1.22 | length 5.4
  Top Layer w0.254: U1.22@30.421,37.004 32.771,37.004 v1(33.671,37.904)
  Bottom Layer w0.254: v1(33.671,37.904) 34.492,38.725 TP2.1@35.125,38.725
ACT-LED: R14.2 U2.27 | length 16.8
  Top Layer w0.2: R14.2@23.65,17.05 23.671,17.071 v1(23.671,18.466) ; U2.27@31.875,25.325 31.875,26.075 v1(32.302,26.502)
  Bottom Layer w0.2: v1(23.671,18.466) 23.871,18.266 27.196,18.266 32.325,23.395 32.325,26.479 v1(32.302,26.502)
CGND: D1.- D2.- D8.1 R18.1 U3.5 U7.4 | length 7.8
  Top Layer w0.2: 17.401,38.699 U3.5@17.401,40.329
  Top Layer w0.8: U7.4@9.523,24.678 9.523,26.173 12.075,28.725 12.075,29.775
D5-PWM: R15.8 U1.9 U6.9 | length 34.5
  Top Layer w0.2: R15.8@19.05,48.375 19.5,48.375 20,48.875 U6.9@20,49.625 ; v1(22.3,30.4) 23.2,31.3 24.947,31.3 26.147,32.5 26.147,33.73 U1.9@26.171,33.754
  Bottom Layer w0.2: v1(19.825,48.7) 20.053,48.7 21.325,47.428 21.325,45.557 17.948,42.18 17.948,30.238 19.332,28.854 21.528,28.854 22.3,29.626 v1(22.3,30.4)
D6-PWM: R15.7 U1.10 U6.10 | length 35.5
  Top Layer w0.2: R15.7@19.05,47.575 19.75,47.575 20.525,48.35 U6.10@20.525,49.625 ; v1@23.425,30.325 v1(23.425,30.45) 23.925,30.95 25.092,30.95 26.671,32.529 U1.10@26.671,33.754
  Bottom Layer w0.2: v1(20.075,47.9) 20.075,47.803 20.975,46.903 20.975,45.702 17.598,42.325 17.598,30.093 19.187,28.504 21.673,28.504 23.425,30.256 v1(23.425,30.45)
D8: R23.2 U1.12 | length 37.3
  Top Layer w0.2: v1@24.804,30.404 26.128,30.404 26.23,30.506 26.231,30.506 27.671,31.946 U1.12@27.671,33.754 ; v1(39.125,25.6) v1@42.5,25.6 ; v1(49.55,21) R23.2@50.275,21
  Bottom Layer w0.2: v1(24.8,30.4) 24.8,29.436 24.322,28.959 24.322,27.878 25.246,26.954 30.091,26.954 30.668,27.531 36.919,27.531 38.85,25.6 v1(39.125,25.6) ; v1(42.5,25.628) 47.128,21 v1(49.55,21)
D9-PWM: R15.6 U1.13 U6.11 | length 38.2
  Top Layer w0.2: R15.6@19.05,46.775 19.925,46.775 v1(20.125,46.975) 21.025,47.875 U6.11@21.025,49.625 ; v1@23.522,29.576 23.576,29.576 v1(23.676,29.677) 23.849,29.85 26.069,29.85 26.375,30.156 26.423,30.156 28.171,31.904 U1.13@28.171,33.754
  Bottom Layer w0.2: v1(20.125,46.975) 20.125,46.803 20.625,46.303 20.625,45.847 17.248,42.47 17.248,29.91 19.031,28.127 21.902,28.127 23.452,29.677 v1(23.676,29.677) ; v1@23.522,29.576 v1@23.576,29.576
D10-PWM: R15.5 U1.14 U6.12 | length 39.2
  Top Layer w0.2: R15.5@19.05,45.975 19.975,45.975 v1(20.075,46.075) 21.5,47.5 U6.12@21.5,49.625 ; v1(23.5,28.925) 23.769,28.925 24.344,29.5 26.214,29.5 26.52,29.806 26.848,29.806 28.671,31.629 U1.14@28.671,33.754
  Bottom Layer w0.2: v1(20.075,46.075) 16.898,42.898 16.898,29.727 18.875,27.75 22.325,27.75 v1(23.5,28.925)
D17: U1.26 U6.14 | length 21.6
  Top Layer w0.2: U6.14@22.525,49.625 22.525,47.9 23.55,46.875 v1(24.3,46.875) ; U1.26@29.171,38.754 29.171,39.129 29.842,39.8 30.7,39.8 31.675,38.825 32.305,38.825 32.721,39.241 v1(32.721,41.229)
  Bottom Layer w0.2: v1(24.3,46.875) 25.847,46.875 26.77,45.952 27.426,45.952 31.5,41.878 31.5,41.647 31.822,41.325 32.625,41.325 v1(32.721,41.229)
E-CS: R19.1 U1.2 U2.32 | length 21.3
  Top Layer w0.2: R19.1@24.021,27.929 24.07,27.929 v1(24.872,28.731) 24.872,28.728 24.896,28.704 24.998,28.806 25.994,28.806 26.054,28.746 v1(26.054,28.856) ; 24.721,37.504 U1.2@25.421,37.504 ; v1(28.625,28.875) 28.625,28.45 29.375,27.7 U2.32@29.375,25.325
  Bottom Layer w0.2: v1(24.496,37.279) 25.846,37.279 27.425,35.7 27.425,33.925 25.45,31.95 25.45,29.525 25.154,29.229 25.154,28.962 v1@24.998,28.806 ; v1(26.054,28.856) 26.204,28.706 27.681,28.706 27.85,28.875 v1(28.625,28.875)
E-INT: R3.8 SEL1.2 U1.32 | length 24.7
  Top Layer w0.2: R3.8@24.05,25.775 24.05,26.658 25.472,28.08 v1(25.472,28.256) ; v1(24.5,38.625) 24.5,38.642 25.175,39.317 25.983,39.317 26.171,39.129 U1.32@26.171,38.754
  Bottom Layer w0.2: v1(24.5,38.625) 25.496,37.629 25.991,37.629 27.775,35.845 27.775,33.78 25.8,31.805 25.8,29.38 25.504,29.084 v1@25.504,28.287 ; v1@25.469,28.104 25.504,28.139 v1@25.504,28.287 ; v1(25.472,28.256) v1@25.504,28.287 ; SEL1.2@28.45,30.35 28.45,29.5 28.525,29.425 28.853,29.425 29.175,29.103 29.175,28.647 28.853,28.325 28.846,28.325 28.825,28.304 25.52,28.304 v1@25.504,28.287
E-RST: R1.5 U1.11 U2.37 | length 25.6
  Top Layer w0.2: v1(24.5,39.55) 24.5,39.775 25.554,40.829 R1.5@26.896,40.829 ; v1(26.35,31.425) 27.171,32.246 U1.11@27.171,33.754 ; U2.37@26.671,24.129 25.546,24.129 25.1,24.575 25.1,26.93 26.748,28.578 v1(26.747,29.256)
  Bottom Layer w0.2: v1(24.5,39.55) 25.05,39 25.115,39 28.125,35.99 28.125,33.635 26.35,31.86 v1(26.35,31.425) 26.35,29.653 v1(26.747,29.256)
E_INT_SEL: SEL1.3 U2.36 | length 8.3
  Top Layer w0.2: v1(27.046,27.754) 27.375,27.425 U2.36@27.375,25.325
  Bottom Layer w0.2: v1(27.046,27.754) 27.246,27.954 29.491,27.954 29.979,28.442 29.979,30.021 29.65,30.35 SEL1.3@29.135,30.35
EC_RX_N: C14.1 T1.8 | length 4.1
  Top Layer w0.2: T1.8@35.103,11.62 37.37,11.62 38.25,12.5 C14.1@38.25,13.125
EC_RX_P: C15.1 T1.6 | length 9.5
  Top Layer w0.2: T1.6@35.103,9.08 33.52,9.08 32.42,10.18 32.42,11.823 33.13,12.533 34.683,12.533 35.55,13.4 C15.1@35.55,14.325
EC_RX_VDD: C16.2 R8.2 R9.1 T1.7 | length 13.1
  Top Layer w0.2: v1@33.275,10.6 33.525,10.35 T1.7@35.103,10.35 ; C16.2@38.275,17.5 R9.1@38.275,16.1 R8.2@38.275,14.7 38.325,14.65 v1(39.075,14.65) v1@39.025,14.6
  Bottom Layer w0.2: v1(33.275,10.628) 35.028,10.628 39.05,14.65 v1(39.075,14.65)
EC_TX_VDD: C17.2 R10.1 T1.2 | length 6.2
  Top Layer w0.2: T1.2@35.103,4 38.35,4 C17.2@39.025,4.675 39.771,5.421 R10.1@39.771,6.404
EP_LED_1: JP1.10 R13.1 | length 11.1
  Top Layer w0.2: JP1.10@12.14,19.27 13.935,19.27 14.405,18.8 18.08,18.8 21.205,15.675 R13.1@21.8,15.675